# Altium PCB PCB1.PcbDoc
Units mm, origin at the board's own origin, x right, y up, seen from the top; angles counter-clockwise.
Board outline 106 x 105.99 mm, 2 copper layers (Top Layer, Bottom Layer), stack 1.371 mm thick; 27 components, 43 nets, 205 pads, 402 vias.
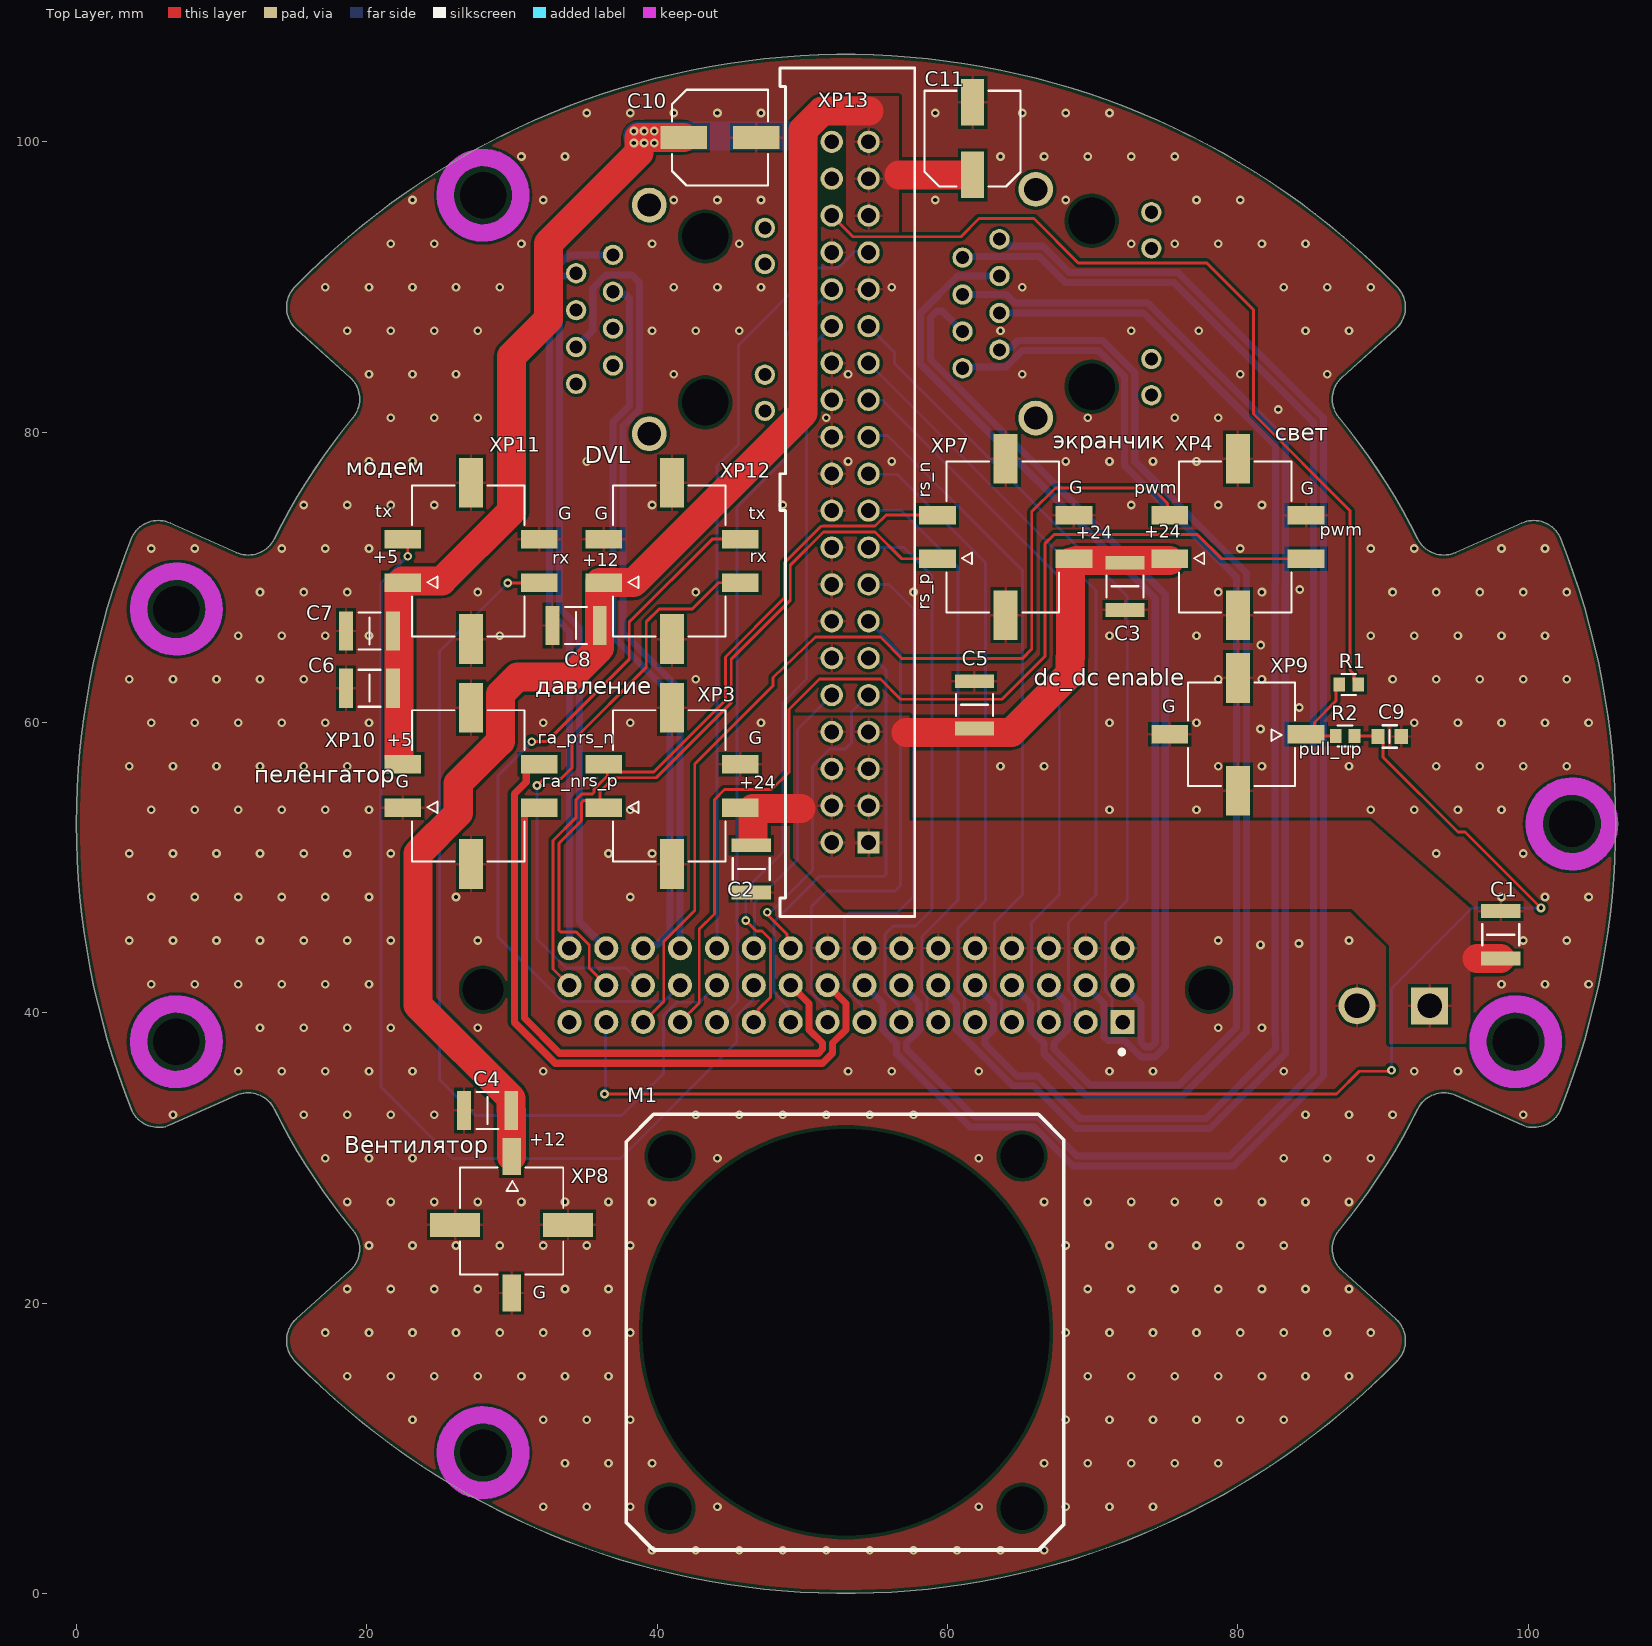
[diagram p0: Top Layer view]
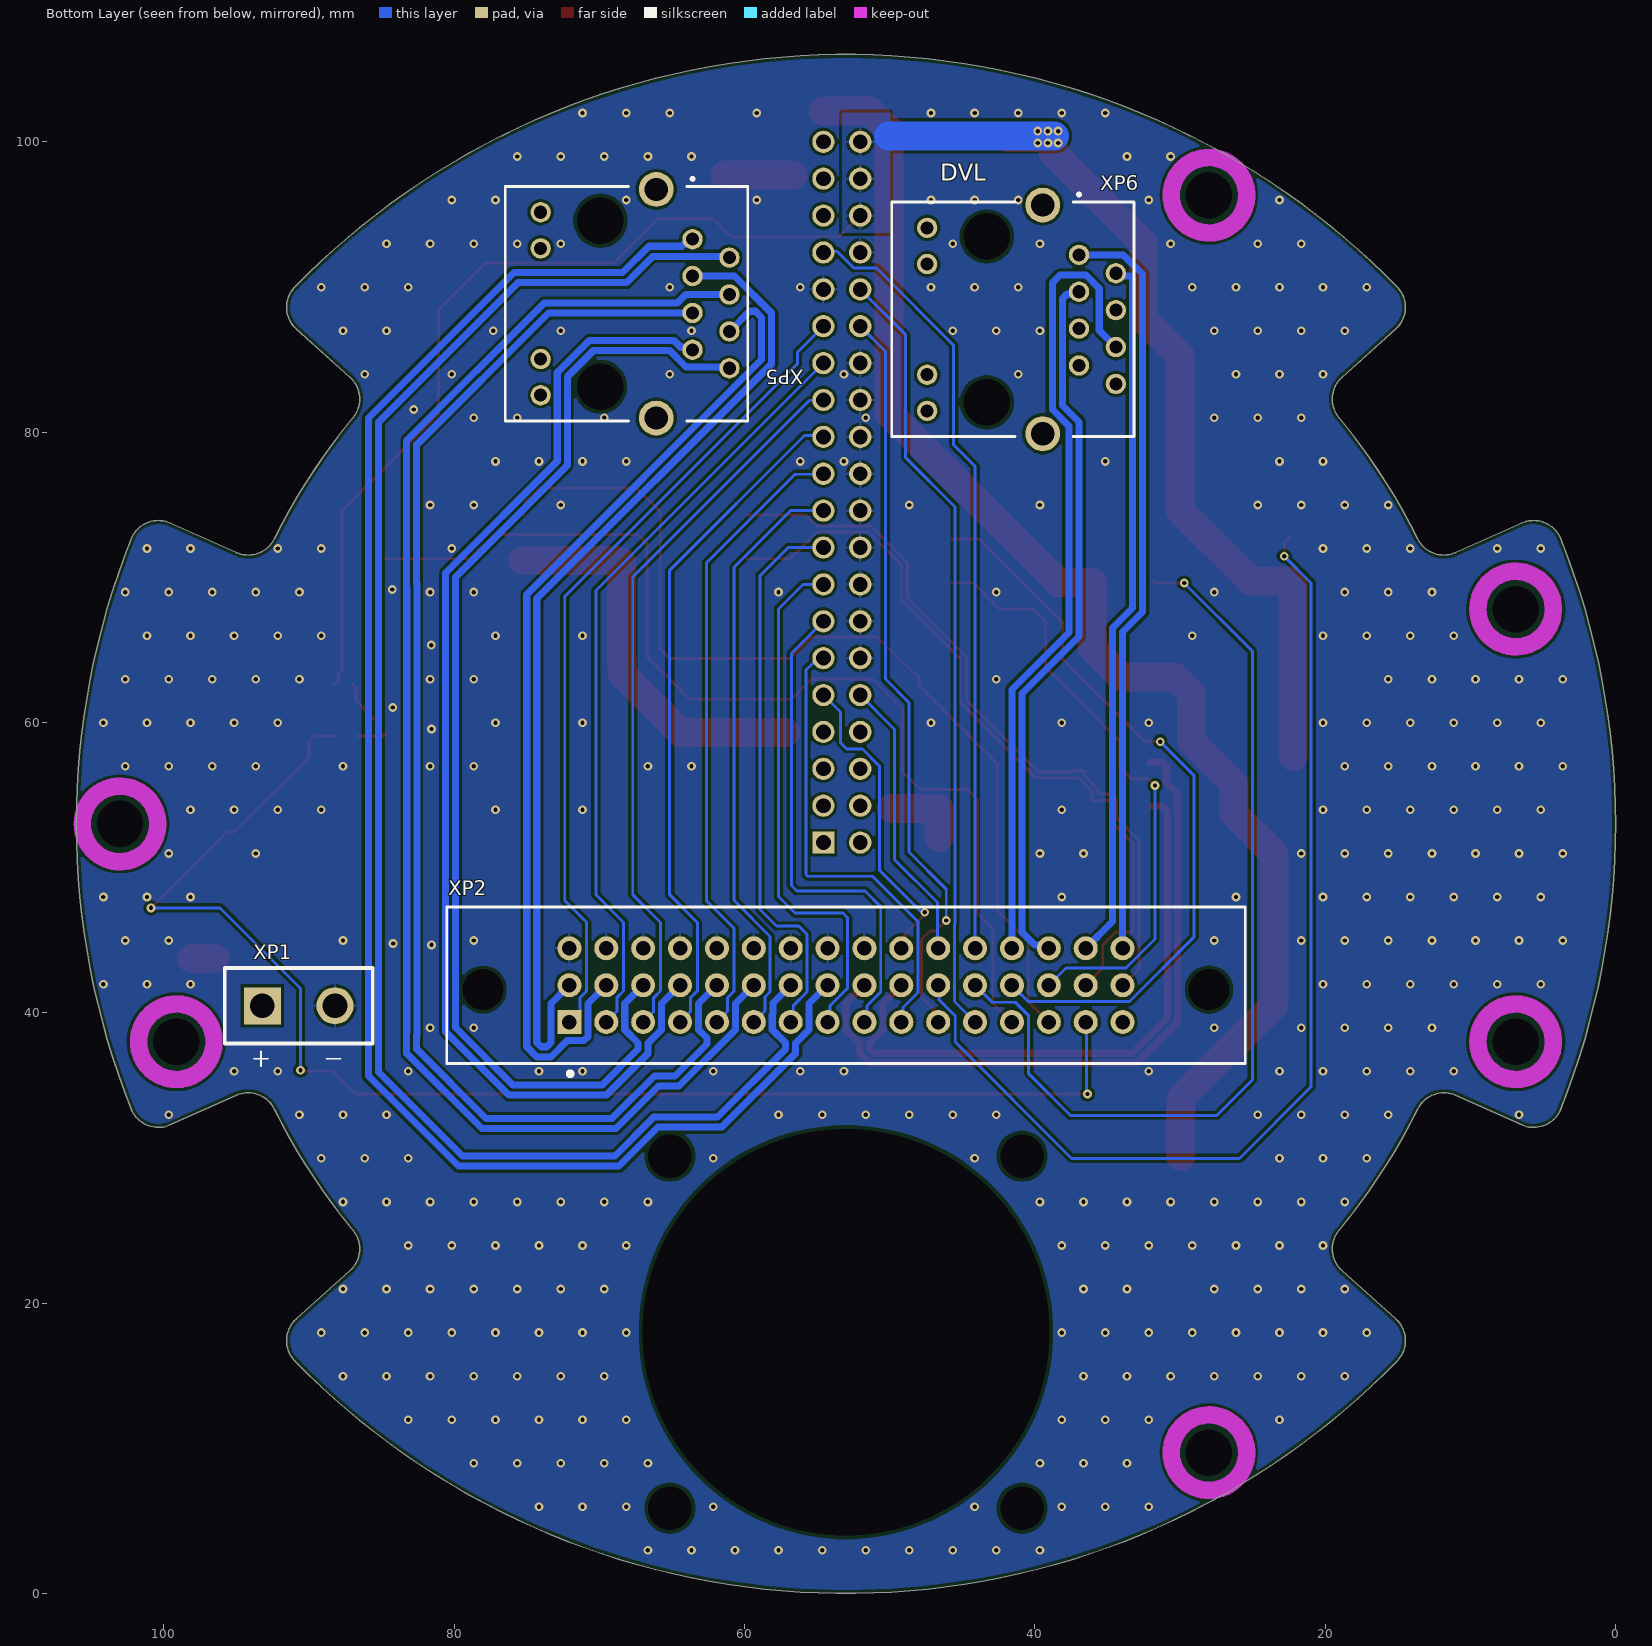
[diagram p1: Bottom Layer view, seen from below]
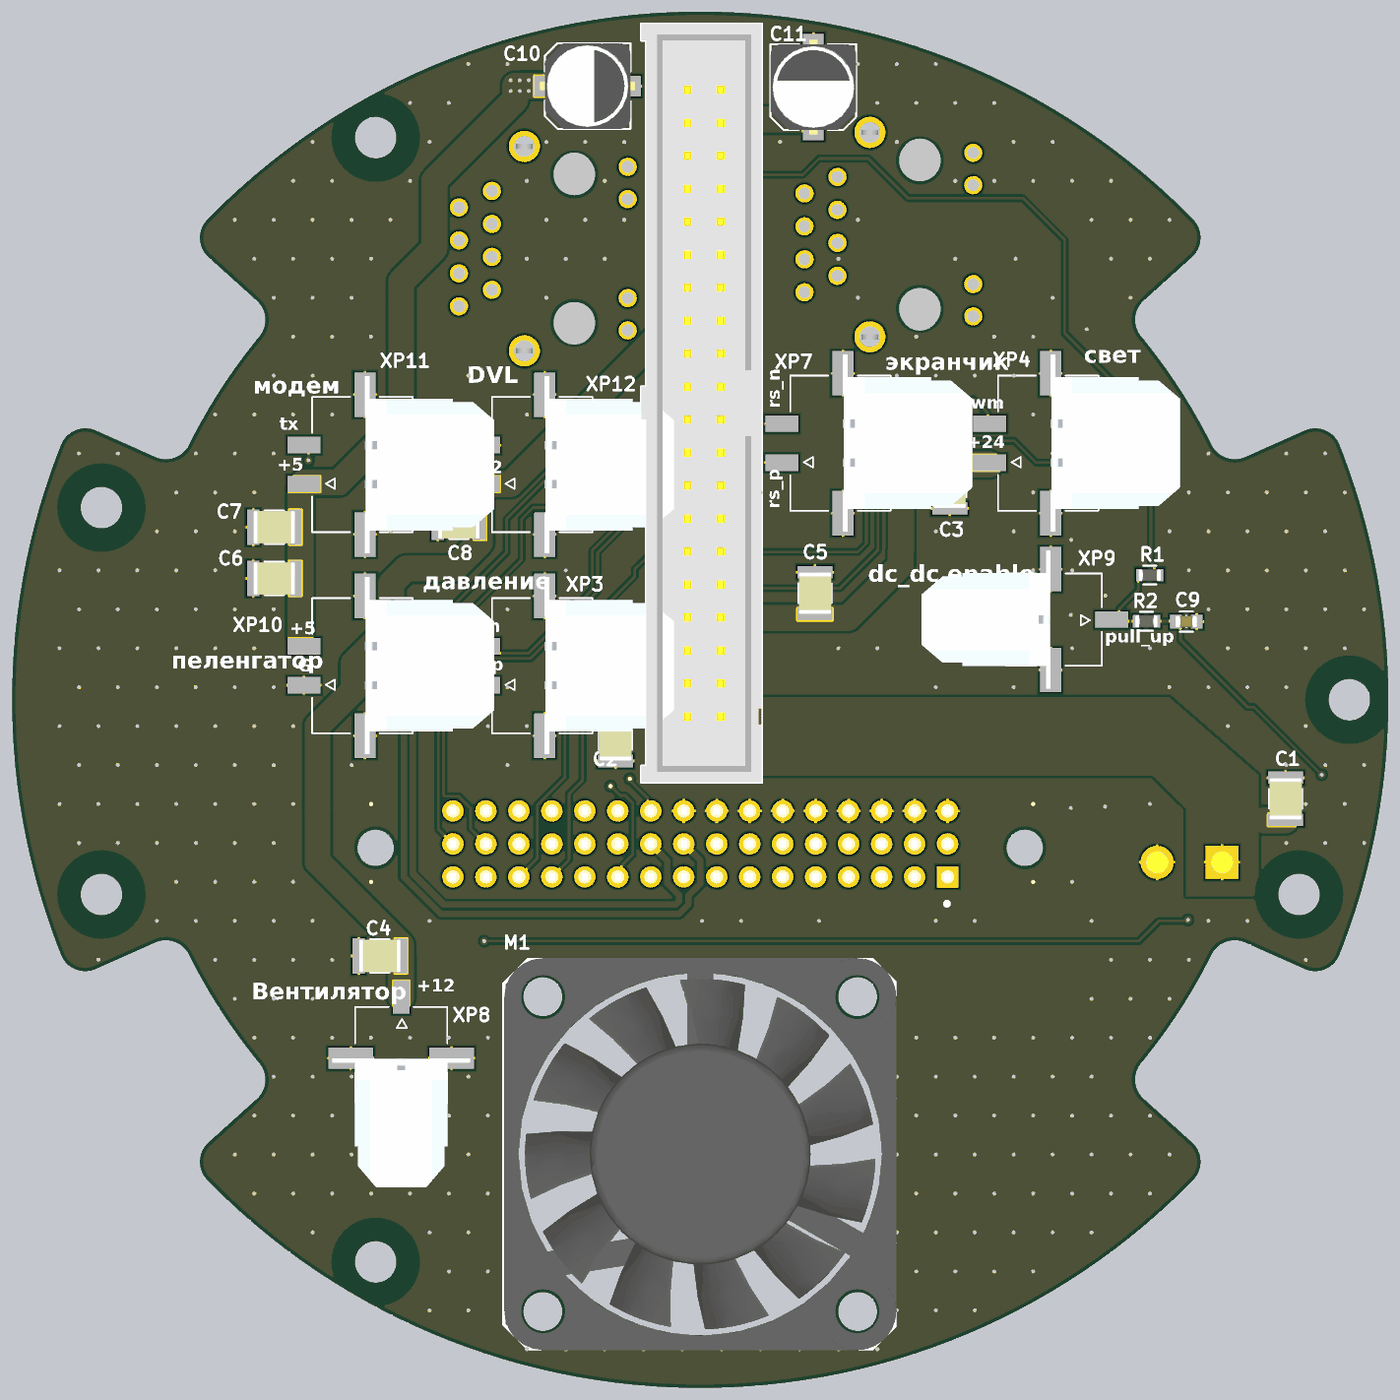
[diagram p2: 3D render of the assembled board from above, using the file's embedded part models]
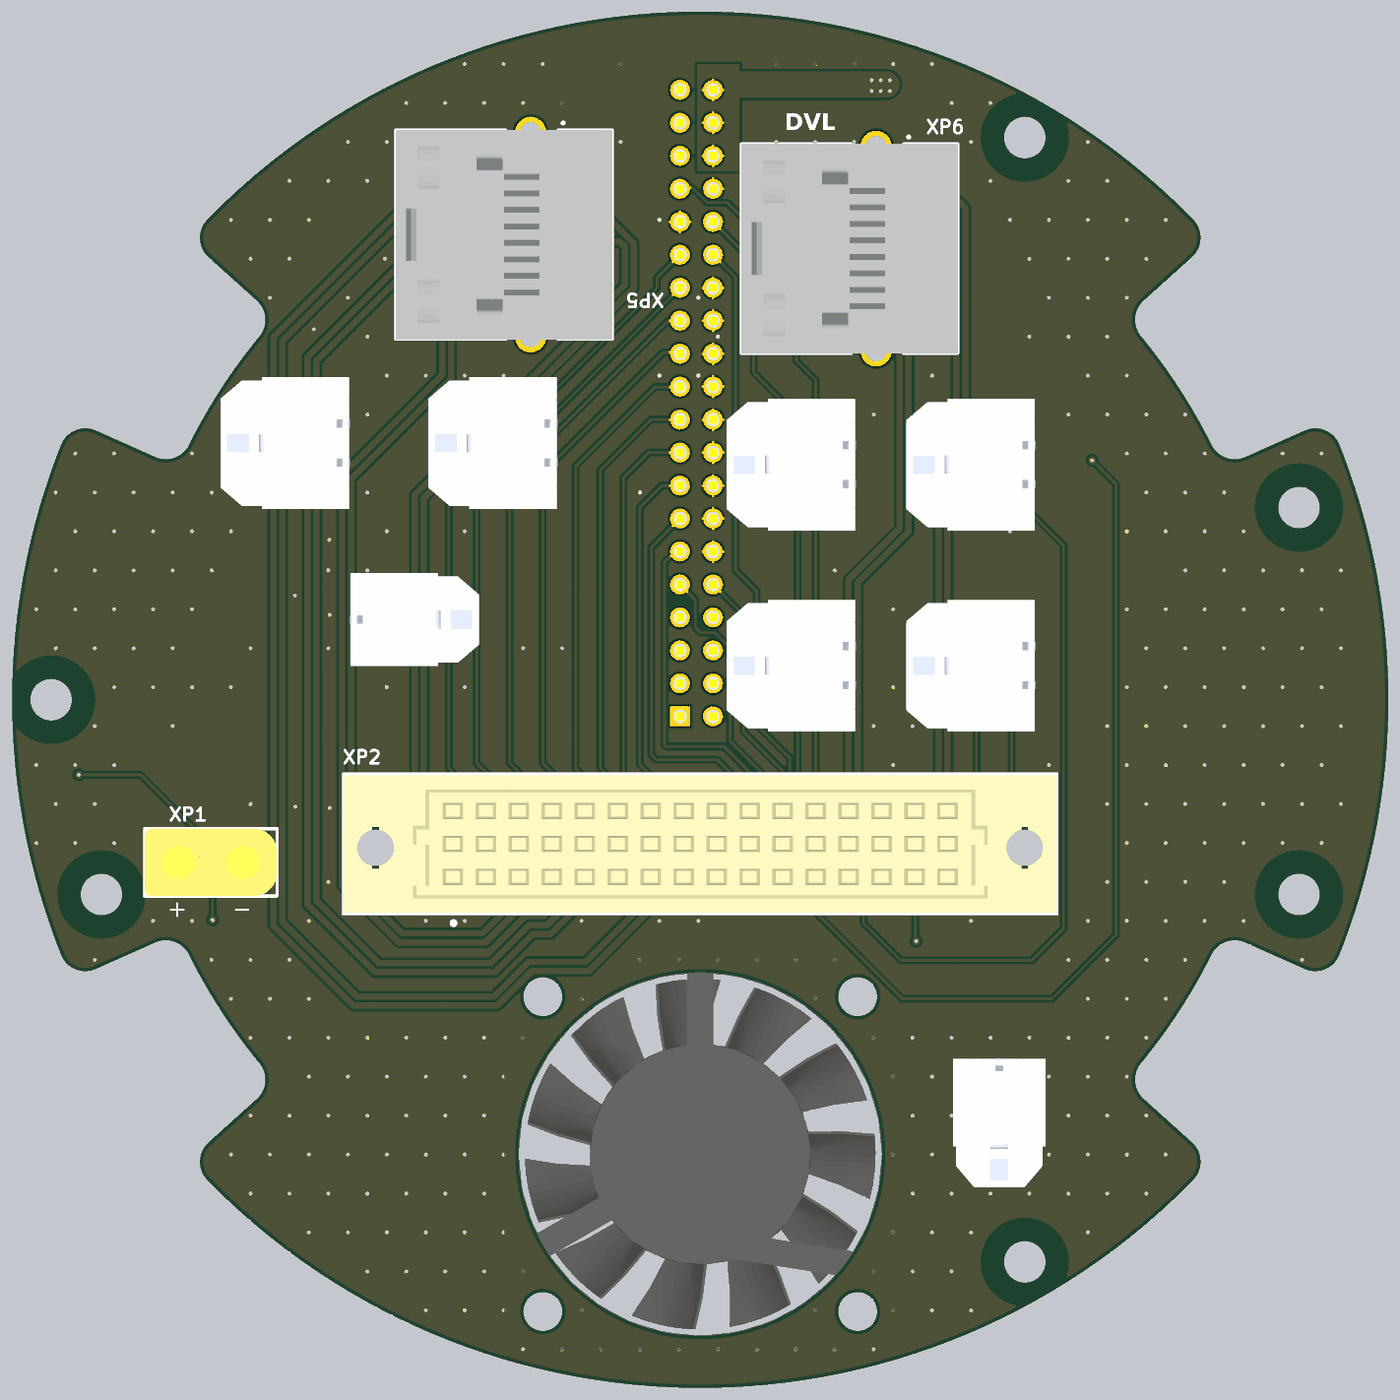
[diagram p3: 3D render of the assembled board from below, using the file's embedded part models]

## Layer stack, top to bottom
Top Solder: solder mask 0.0102, Solder Resist, Dk 3.5
Top Layer: signal copper 0.0356
Dielectric 1: dielectric 1.3, FR-4, Dk 4.8
Bottom Layer: signal copper 0.0356
Bottom Solder: solder mask 0.0102, Solder Resist, Dk 3.5

## Board outline
6.451,32.279 cw(c5.638,34.106) 3.78,33.365 cw(c53.006,53.006) 3.78,72.648 cw(c5.638,71.907) 6.451,73.734 11.023,71.699 ccw(c11.836,73.526) 13.626,72.634 cw(c53.006,53.006) 19.058,80.999 ccw(c17.515,82.271) 18.854,83.757 15.135,87.106 cw(c16.473,88.592) 15.04,89.988 cw(c53.006,53.006) 90.972,89.988 cw(c89.539,88.592) 90.877,87.106 87.158,83.757 ccw(c88.497,82.271) 86.954,80.999 cw(c53.006,53.007) 92.386,72.634 ccw(c94.176,73.526) 94.989,71.699 99.561,73.734 cw(c100.374,71.907) 102.232,72.648 cw(c53.006,53.006) 102.232,33.365 cw(c100.374,34.106) 99.561,32.279 94.989,34.314 ccw(c94.176,32.487) 92.386,33.379 cw(c53.006,53.006) 86.954,25.014 ccw(c88.497,23.742) 87.158,22.255 90.877,18.907 cw(c89.539,17.421) 90.972,16.025 cw(c53.006,53.006) 15.04,16.025 cw(c16.473,17.421) 15.135,18.907 18.854,22.255 ccw(c17.515,23.742) 19.058,25.014 cw(c53.006,53.006) 13.626,33.379 ccw(c11.836,32.487) 11.023,34.314

## Design rules (kind name [scope] priority, off if disabled: settings)
AcuteAngle [All] p1: minimum=3.50000000000000E+0001 checktracksonly=FALSE
BoardOutlineClearance "BoardOutlineClearance 1" [All] p1: gap=0.25 ignorepadtopadclearanceinfootprint=FALSE except(0: Arc-SplitContinuation Track-SplitContinuation SMDPad-SplitContinuation THPad-SplitContinuation Via-SplitContinuation Fill-SplitContinuation Poly-SplitContinuation Region-SplitContinuation Text-SplitContinuation) // Milling
BoardOutlineClearance "BoardOutlineClearance 2" [All] p2: gap=0.4 ignorepadtopadclearanceinfootprint=FALSE except(0: Arc-SplitContinuation Track-SplitContinuation SMDPad-SplitContinuation THPad-SplitContinuation Via-SplitContinuation Fill-SplitContinuation Poly-SplitContinuation Region-SplitContinuation Text-SplitContinuation) // V-Cut
Clearance "Clearance-1 1 Oz" [All] p1: gap=0.2 ignorepadtopadclearanceinfootprint=FALSE except(0.25: Arc-Hole Track-Hole SMDPad-Hole THPad-Hole Via-Hole Fill-Hole Poly-Hole Region-Hole Text-Hole) // Standart
Clearance "Clearance-2 1 Oz" [All] p2: gap=0.15 ignorepadtopadclearanceinfootprint=FALSE except(0.2: Arc-Fill Arc-Poly Track-Fill Track-Poly SMDPad-Fill SMDPad-Poly THPad-Fill THPad-Poly Via-Fill Via-Poly Fill-Fill Fill-Poly Poly-Poly; 0.25: Arc-Hole Track-Hole SMDPad-Hole THPad-Hole Via-Hole Fill-Hole Poly-Hole Region-Hole Text-Hole) // Advance
Clearance "Clearance 2 Oz" [All] p3: gap=0.3 ignorepadtopadclearanceinfootprint=FALSE except(0.25: Arc-Hole Track-Hole SMDPad-Hole THPad-Hole Via-Hole Fill-Hole Poly-Hole Region-Hole Text-Hole)
Clearance "Clearance-1 1/2 Oz" [All] p4: gap=0.125 ignorepadtopadclearanceinfootprint=FALSE except(0.2: Arc-Fill Arc-Poly Track-Fill Track-Poly SMDPad-SMDPad SMDPad-Fill SMDPad-Poly THPad-Fill THPad-Poly Via-Fill Via-Poly Fill-Fill Fill-Poly Poly-Poly Poly-Region Poly-Text; 0.25: Arc-Hole Track-Hole SMDPad-Hole THPad-Hole Via-Hole Fill-Hole Poly-Hole Region-Hole Text-Hole) // Standart
Clearance "Clearance-2 1/2 Oz" [All] p5: gap=0.1 ignorepadtopadclearanceinfootprint=FALSE except(0.15: Arc-Fill Arc-Poly Track-Fill Track-Poly SMDPad-SMDPad SMDPad-Fill SMDPad-Poly THPad-Fill THPad-Poly Via-Fill Via-Poly Fill-Fill Fill-Poly Poly-Poly Poly-Region Poly-Text; 0.25: Arc-Hole Track-Hole SMDPad-Hole THPad-Hole Via-Hole Fill-Hole Poly-Hole Region-Hole Text-Hole) // Advance
Clearance "Clearance 3 Oz" [All] p6: gap=0.35 ignorepadtopadclearanceinfootprint=FALSE except(0.25: Arc-Hole Track-Hole SMDPad-Hole THPad-Hole Via-Hole Fill-Hole Poly-Hole Region-Hole Text-Hole)
DiffPairsRouting "DiffPairsRouting usb" [InNetClass('USB')] p1: maxlimit=0.2 minlimit=0.2 mostfreqgap=0.2 toplayer_minwidth=0.49 toplayer_maxwidth=0.49 toplayer_prefwidth=0.49 bottomlayer_minwidth=0.49 bottomlayer_maxwidth=0.49 bottomlayer_prefwidth=0.49 impedanceprofiledriven=TRUE impedanceprofileid={BD4CF581-8F51-437B-B1AF-2C4708C40790} impedanceprofilevalue=100.000000 maxuncoupledlength=12.7
DiffPairsRouting "DiffPairsRouting ethernet" [InNetClass('Ethernet')] p2: maxlimit=0.2 minlimit=0.2 mostfreqgap=0.2 toplayer_minwidth=0.49 toplayer_maxwidth=0.49 toplayer_prefwidth=0.49 bottomlayer_minwidth=0.49 bottomlayer_maxwidth=0.49 bottomlayer_prefwidth=0.49 impedanceprofiledriven=TRUE impedanceprofileid={BD4CF581-8F51-437B-B1AF-2C4708C40790} impedanceprofilevalue=100.000000 maxuncoupledlength=12.7
DiffPairsRouting "DiffPairsRouting 1 Oz" [All] p3: maxlimit=0.254 minlimit=0.2 mostfreqgap=0.254 toplayer_minwidth=0.2 toplayer_maxwidth=0.381 toplayer_prefwidth=0.381 bottomlayer_minwidth=0.2 bottomlayer_maxwidth=0.381 bottomlayer_prefwidth=0.381 maxuncoupledlength=12.7
DiffPairsRouting "DiffPairsRouting 1/2 Oz" [All] p4: maxlimit=0.254 minlimit=0.1 mostfreqgap=0.254 toplayer_minwidth=0.1 toplayer_maxwidth=0.381 toplayer_prefwidth=0.381 bottomlayer_minwidth=0.1 bottomlayer_maxwidth=0.381 bottomlayer_prefwidth=0.381 maxuncoupledlength=12.7
HoleSize [HasPad('M1-0')] p1: absolutevalues=TRUE maxlimit=100 minlimit=0.025 maxpercent=80.000 minpercent=20.000
HoleSize "Minimum HoleSize" [IsPad] p2: absolutevalues=TRUE maxlimit=5.9 minlimit=0.6 maxpercent=80.000 minpercent=20.000
HoleSize "Minimum HoleSize VIA 1" [IsVia] p3: absolutevalues=TRUE maxlimit=5.9 minlimit=0.3 maxpercent=80.000 minpercent=20.000 // Standart
HoleSize "Minimum HoleSize VIA 2" [IsVia] p4: absolutevalues=TRUE maxlimit=5.9 minlimit=0.2 maxpercent=80.000 minpercent=20.000 // Advance
HoleToHoleClearance Hole2HoleClearance [All] p1: gap=0.25 allowstackedmicrovias=FALSE
MinimumAnnularRing "Minimum AR VIA Standart" [IsVia] p1: minimumring=0.15
MinimumAnnularRing "Minimum AR PAD Standart" [IsPAD] p2: minimumring=0.2
MinimumAnnularRing "Minimum AR VIA Advance" [IsVia] p3: minimumring=0.1
MinimumAnnularRing "Minimum AR PAD Advance" [IsPAD] p4: minimumring=0.15
MinimumSolderMaskSliver "SolderMask Bridge Standart" [All] p1: minsoldermaskwidth=0.15 // All Masks
MinimumSolderMaskSliver "SolderMask Bridge Advance" [All] p2: minsoldermaskwidth=0.1 // Mask LDI
PlaneClearance "PlaneClearance 1 Oz" [All] p1: clearance=0.2
PlaneClearance "PlaneClearance-1 1/2 Oz" [All] p2: clearance=0.2 // Standart
PlaneClearance "PlaneClearance-2 1/2 Oz" [All] p3: clearance=0.15 // Advance
PlaneClearance "PlaneClearance 3 Oz" [All] p4: clearance=0.35
PlaneClearance "PlaneClearance 2 Oz" [All] p5: clearance=0.3
PlaneConnect "TermalConnect-1 1 Oz" [All] p1: planeconnectstyle=Relief reliefexpansion=0.2 reliefentries=4 reliefconductorwidth=0.2 reliefairgap=0.2 // Standart
PlaneConnect "TermalConnect-2 1 Oz" [All] p2: pad.planeconnectstyle=Relief pad.reliefexpansion=0.15 pad.reliefentries=4 pad.reliefconductorwidth=0.2 pad.reliefairgap=0.2 via.planeconnectstyle=Direct via.reliefexpansion=0.15 via.reliefentries=4 via.reliefconductorwidth=0.15 via.reliefairgap=0.15 // Advance
PlaneConnect "TermalConnect-1 1/2 Oz" [All] p3: planeconnectstyle=Relief reliefexpansion=0.2 reliefentries=4 reliefconductorwidth=0.2 reliefairgap=0.2 // Standart
PlaneConnect "TermalConnect-2 1/2 Oz" [All] p4: pad.planeconnectstyle=Relief pad.reliefexpansion=0.15 pad.reliefentries=4 pad.reliefconductorwidth=0.15 pad.reliefairgap=0.15 via.planeconnectstyle=Direct via.reliefexpansion=0.15 via.reliefentries=4 via.reliefconductorwidth=0.15 via.reliefairgap=0.15 // Advance
PlaneConnect "TermalConnect 3 Oz" [All] p5: planeconnectstyle=Relief reliefexpansion=0.2 reliefentries=4 reliefconductorwidth=0.35 reliefairgap=0.35 // Standart
PlaneConnect "TermalConnect 2 Oz" [All] p6: planeconnectstyle=Relief reliefexpansion=0.2 reliefentries=4 reliefconductorwidth=0.3 reliefairgap=0.3 // Standart
PolygonConnect "PolygonConnect-1 1 Oz" [All] p1: thpad.connectstyle=Relief thpad.reliefconductorwidth=0.2 thpad.reliefentries=4 thpad.polygonreliefangle="90 Angle" thpad.airgapwidth=0.2 smdpad.connectstyle=Relief smdpad.reliefconductorwidth=0.2 smdpad.reliefentries=4 smdpad.polygonreliefangle="90 Angle" smdpad.airgapwidth=0.2 via.connectstyle=Direct via.reliefconductorwidth=0.254 via.reliefentries=4 via.polygonreliefangle="90 Angle" via.airgapwidth=0.254 // Standart
PolygonConnect "PolygonConnect-2 1 Oz" [All] p2: thpad.connectstyle=Relief thpad.reliefconductorwidth=0.15 thpad.reliefentries=4 thpad.polygonreliefangle="90 Angle" thpad.airgapwidth=0.15 smdpad.connectstyle=Relief smdpad.reliefconductorwidth=0.15 smdpad.reliefentries=4 smdpad.polygonreliefangle="90 Angle" smdpad.airgapwidth=0.15 via.connectstyle=Direct via.reliefconductorwidth=0.254 via.reliefentries=4 via.polygonreliefangle="90 Angle" via.airgapwidth=0.254 // Advance
PolygonConnect "PolygonConnect-1 1/2 Oz" [All] p3: thpad.connectstyle=Relief thpad.reliefconductorwidth=0.15 thpad.reliefentries=4 thpad.polygonreliefangle="90 Angle" thpad.airgapwidth=0.2 smdpad.connectstyle=Relief smdpad.reliefconductorwidth=0.2 smdpad.reliefentries=4 smdpad.polygonreliefangle="90 Angle" smdpad.airgapwidth=0.2 via.connectstyle=Direct via.reliefconductorwidth=0.254 via.reliefentries=4 via.polygonreliefangle="90 Angle" via.airgapwidth=0.254 // Standart
PolygonConnect "PolygonConnect-2 1/2 Oz" [All] p4: thpad.connectstyle=Relief thpad.reliefconductorwidth=0.125 thpad.reliefentries=4 thpad.polygonreliefangle="90 Angle" thpad.airgapwidth=0.15 smdpad.connectstyle=Relief smdpad.reliefconductorwidth=0.125 smdpad.reliefentries=4 smdpad.polygonreliefangle="90 Angle" smdpad.airgapwidth=0.15 via.connectstyle=Direct via.reliefconductorwidth=0.254 via.reliefentries=4 via.polygonreliefangle="90 Angle" via.airgapwidth=0.254 // Advance
PolygonConnect "PolygonConnect 3 Oz" [All] p5: thpad.connectstyle=Relief thpad.reliefconductorwidth=0.35 thpad.reliefentries=4 thpad.polygonreliefangle="90 Angle" thpad.airgapwidth=0.35 smdpad.connectstyle=Relief smdpad.reliefconductorwidth=0.35 smdpad.reliefentries=4 smdpad.polygonreliefangle="90 Angle" smdpad.airgapwidth=0.35 via.connectstyle=Direct via.reliefconductorwidth=0.254 via.reliefentries=4 via.polygonreliefangle="90 Angle" via.airgapwidth=0.254
PolygonConnect "PolygonConnect 2 Oz" [All] p6: thpad.connectstyle=Relief thpad.reliefconductorwidth=0.3 thpad.reliefentries=4 thpad.polygonreliefangle="90 Angle" thpad.airgapwidth=0.3 smdpad.connectstyle=Relief smdpad.reliefconductorwidth=0.3 smdpad.reliefentries=4 smdpad.polygonreliefangle="90 Angle" smdpad.airgapwidth=0.3 via.connectstyle=Direct via.reliefconductorwidth=0.254 via.reliefentries=4 via.polygonreliefangle="90 Angle" via.airgapwidth=0.254
RoutingCorners [All] p1 off: cornerstyle=45-Degree minsetback=2.54 maxsetback=2.54
RoutingVias [All] p1: holewidth=0.3 width=0.6 viastyle="Through Hole" minholewidth=0.2 minwidth=0.4 maxholewidth=5.9 maxwidth=6.4
SilkToSilkClearance Silk2SilkClearance [All] p1 off: silktosilkclearance=0.15
SilkToSolderMaskClearance Silk2SolderMaskClearance [IsPad] p1 off: minsilkscreentomaskgap=0.15 clearancetoexposedcopper=TRUE
SolderMaskExpansion SolderMaskExpansion-1 [HoleSize = 0.3] p1: expansion=0.05 istentingtop=TRUE // Standart
SolderMaskExpansion [All] p2: expansion=0.102 istentingtop=FALSE
SolderMaskExpansion "SolderMaskExpansion LDI" [All] p3: expansion=0.025 istentingtop=FALSE // Advance
SupplyNets "Schematic Supply Nets_5" [InNet('+5')] p1: voltage=0.000
SupplyNets "Schematic Supply Nets_4" [InNet('GND')] p2: voltage=0.000
SupplyNets "Schematic Supply Nets_3" [InNet('+24_1')] p3: voltage=0.000
SupplyNets "Schematic Supply Nets_2" [InNet('+24_2')] p4: voltage=0.000
SupplyNets "Schematic Supply Nets_1" [InNet('+24')] p5: voltage=0.000
SupplyNets "Schematic Supply Nets" [InNet('+12')] p6: voltage=0.000
UnRoutedNet [All] p1: checkbadconnections=TRUE
Width "Width 1 Oz" [All] p1: maxlimit=10 minlimit=0.15 preferedwidth=0.2 checkconnectedcopper=TRUE
Width "Width 1/2 Oz" [All] p2: maxlimit=10 minlimit=0.1 preferedwidth=0.125 checkconnectedcopper=TRUE
Width "Width 3 Oz" [All] p3: maxlimit=10 minlimit=0.35 preferedwidth=0.4 checkconnectedcopper=TRUE
Width "Width 2 Oz" [All] p4: maxlimit=10 minlimit=0.3 preferedwidth=0.35 minimp=50.000000 maximp=50.000000 favimp=50.000000 checkconnectedcopper=TRUE
20 further rules are at their usual default settings.

## Classes and differential pairs
net class USB: GA_N GA_P
net class Ethernet: eth1_N eth1_P eth2_N eth2_P eth3_N eth3_P eth4_N eth4_P eth5_N eth5_P eth6_N eth6_P
differential pair RS485: +RS485_N -RS485_P
differential pair GA: +GA_P -GA_N
differential pair eth6: +eth6_P -eth6_N
differential pair eth5: +eth5_P -eth5_N
differential pair eth4: +eth4_P -eth4_N
differential pair eth3: +eth3_P -eth3_N
differential pair eth2: +eth2_P -eth2_N
differential pair eth1: +eth1_P -eth1_N

## Components (designator, comment, footprint, x,y, rotation, side; value= is the part's Value field where it differs from the comment)
C1 "Capacitor" 1210C 98.1,45.375 r270 top value="22 мк"
C2 "Capacitor" 1210C 46.482,49.911 r90 top value="22 мк"
C3 "Capacitor" 1210C 72.225,69.375 r90 top value="22 мк"
C4 "Capacitor" 1210C 28.321,33.274 r0 top value="22 мк"
C5 "Capacitor" 1210C 61.849,61.214 r270 top value="22 мк"
C6 "Capacitor" 1210C 20.193,62.357 r0 top value="22 мк"
C7 "Capacitor" 1210C 20.193,66.294 r0 top value="22 мк"
C8 "Capacitor" 1210C 34.417,66.675 r0 top value="22 мк"
C9 "Capacitor" 0603C 90.447,59.028 r180 top value="0,1 мк"
C10 "Capacitor" ECAP_SMD_6,6x6,6 44.325,100.275 r0 top value="100 мк"
C11 "Capacitor" ECAP_SMD_6,6x6,6 61.722,100.203 r90 top value="100 мк"
M1 "cooler3030" cooler3030 53.006,18.006 r180 top
R1 "Resistor" 0603R 87.63,62.611 r180 top value="1,0 к"
R2 "Resistor" 0603R 87.376,59.055 r180 top value="1,0 к"
XP1 "XT30UPB-F" XT30UPB-F 90.7,40.483 r180 bottom locked
XP2 "DIN41612_48_3row_straight_female" DIN41612_48_3row_straight_female 53.006,41.9 r0 bottom locked
XP3 "430450418" MOLEX_430450418 41.021,55.626 r270 top
XP4 "430450418" MOLEX_430450418 80,72.771 r270 top
XP5 "1734577-3" 1-1734577-3-rj45-8p8c 63.575,93.28 r90 bottom
XP6 "1734577-3" 1-1734577-3-rj45-8p8c 36.957,92.202 r90 bottom
XP7 "430450418" MOLEX_430450418 64,72.771 r270 top
XP8 "430450218" Molex_430450218 29.972,25.4 r180 top
XP9 "430450218" Molex_430450218 80,59.182 r90 top
XP10 "430450418" MOLEX_430450418 27.178,55.626 r270 top
XP11 "430450418" MOLEX_430450418 27.178,71.12 r270 top
XP12 "430450418" MOLEX_430450418 41.021,71.12 r270 top
XP13 "IDC_40_Male conector" "IDC_40_Male conector" 53.295,75.855 r90 top locked

## Footprints (in the part's own frame and the unit in brackets; to place one, negate y for a bottom-side part, rotate by r counter-clockwise, add the part's x,y. Pads: shape width x height; smd on the part's side, far side on the other; paste and mask are expansions set on the pad)
1-1734577-3-rj45-8p8c [mm]
  round 1.4 hole 0.9: 1(0,0) 2(-1.27,-2.54) 3(-2.54,0) 4(-3.81,-2.54) 5(-5.08,0) 6(-6.35,-2.54) 7(-7.62,0) 8(-8.89,-2.54) 9(-10.745,10.46) 10(-8.255,10.46) 11(-0.635,10.46) 12(1.855,10.46)
  round 2.4 hole 1.6: MH1(3.43,2.5) MH2(-12.32,2.5)
  round 0 hole 3.2 unplated: MH3(1.27,6.35) MH4(-10.16,6.35)
  silkscreen extent -12.52,-3.8 4.25,12.9, body extent -12.52,-3.8 3.63,12.9, height 16.54
0603C [mm] "Chip Resistor, 2-Leads, Body 1,40x0,80mm, IPC Medium Density"
  rect 0.9x1.05 smd: 1(-0.8,0) 2(0.8,0)
  silkscreen extent -0.5,-0.77 0.5,0.77, body extent -0.85,-0.45 0.85,0.45, height 0.9
0603R [mm] "Chip Resistor, 2-Leads, Body 1.60x0.85mm, IPC Medium Density"
  rect 0.8x0.95 smd: 1(-0.65,0) 2(0.65,0)
  silkscreen extent -0.5,-0.72 0.5,0.72, body extent -0.87,-0.47 0.88,0.48, height 0.9
1210C [mm]
  rect 0.954x2.706 smd paste+0: 1(-1.625,0) 2(1.625,0)
  silkscreen extent -0.75,-1.28 0.75,1.28, body extent -2.35,-1.6 2.35,1.6, height 0.25
cooler3030 [mm]
  round 1.4 hole 3 unplated: 0(-12.125,12.125) 0(-12.125,-12.125) 0(12.125,12.125) 0(12.125,-12.125)
  round 0 hole 28 unplated: 0(0,0)
  silkscreen extent -15,-15 15.13,15, body extent -15.1,-15.1 15.1,15.1, height 6.6
DIN41612_48_3row_straight_female [mm]
  rect 1.65x1.65 hole 1: A1(19.05,2.54)
  round 1.65 hole 1: A2(16.51,2.54) A3(13.97,2.54) A4(11.43,2.54) A5(8.89,2.54) A6(6.35,2.54) A7(3.81,2.54) A8(1.27,2.54) A9(-1.27,2.54) A10(-3.81,2.54) A11(-6.35,2.54) A12(-8.89,2.54) A13(-11.43,2.54) A14(-13.97,2.54) A15(-16.51,2.54) A16(-19.05,2.54) B1(19.05,0) B2(16.51,0) B3(13.97,0) B4(11.43,0) B5(8.89,0) B6(6.35,0) B7(3.81,0) B8(1.27,0) B9(-1.27,0) B10(-3.81,0) B11(-6.35,0) B12(-8.89,0) B13(-11.43,0) B14(-13.97,0) B15(-16.51,0) B16(-19.05,0) C1(19.05,-2.54) C2(16.51,-2.54) C3(13.97,-2.54) C4(11.43,-2.54) C5(8.89,-2.54) C6(6.35,-2.54) C7(3.81,-2.54) C8(1.27,-2.54) C9(-1.27,-2.54) C10(-3.81,-2.54) C11(-6.35,-2.54) C12(-8.89,-2.54) C13(-11.43,-2.54) C14(-13.97,-2.54) C15(-16.51,-2.54) C16(-19.05,-2.54)
  round 2.5 hole 2.8 unplated: ""(-25,0.3) ""(25,0.3)
  silkscreen extent -27.5,-5.4 27.5,6.25, body extent -27.45,-5.3 27.45,5.29, height 11.3
ECAP_SMD_6,6x6,6 [mm]
  rect 3.2x1.6 smd: 1(-2.5,0) 2(2.5,0)
  silkscreen extent -3.3,-3.3 3.3,3.3, body extent -3.65,-3.3 3.65,3.3, height 7.7
"IDC_40_Male conector" [mm] "Connector; IDC"
  rect 1.53x1.53 / inner round 1.53 / far side rect 1.53x1.53 hole 1.02: 1(-24.13,-1.27)
  round 1.53 hole 1.02: 2(-24.13,1.27) 3(-21.59,-1.27) 4(-21.59,1.27) 5(-19.05,-1.27) 6(-19.05,1.27) 7(-16.51,-1.27) 8(-16.51,1.27) 9(-13.97,-1.27) 10(-13.97,1.27) 11(-11.43,-1.27) 12(-11.43,1.27) 13(-8.89,-1.27) 14(-8.89,1.27) 15(-6.35,-1.27) 16(-6.35,1.27) 17(-3.81,-1.27) 18(-3.81,1.27) 19(-1.27,-1.27) 20(-1.27,1.27) 21(1.27,-1.27) 22(1.27,1.27) 23(3.81,-1.27) 24(3.81,1.27) 25(6.35,-1.27) 26(6.35,1.27) 27(8.89,-1.27) 28(8.89,1.27) 29(11.43,-1.27) 30(11.43,1.27) 31(13.97,-1.27) 32(13.97,1.27) 33(16.51,-1.27) 34(16.51,1.27) 35(19.05,-1.27) 36(19.05,1.27) 37(21.59,-1.27) 38(21.59,1.27) 39(24.13,-1.27) 40(24.13,1.27)
  silkscreen extent -29.21,-4.45 29.21,4.82, body extent -29.21,-4.45 29.21,4.83, height 8.89
Molex_430450218 [mm]
  rect 3.43x1.65 smd mask+0.076: 0(-3.885,0) 0(3.885,0)
  rect 1.27x2.54 smd mask+0.076: 1(0,-4.7) 2(0,4.7)
  silkscreen extent -3.56,-3.94 3.56,3.43, body extent -5.32,-5.6 5.33,5.6, height 9.96
MOLEX_430450418 [mm]
  rect 3.43x1.65 smd mask+0.076: 0(-5.385,0) 0(5.385,0)
  rect 1.27x2.54 smd mask+0.076: 1(1.5,-4.7) 2(-1.5,-4.7) 3(1.5,4.7) 4(-1.5,4.7)
  silkscreen extent -5.21,-4.06 5.21,3.68, body extent -6.82,-5.6 6.83,5.6, height 9.96
XT30UPB-F [mm]
  round 2.55 hole 1.7: N(2.5,0)
  rect 2.55x2.55 / inner round 2.55 / far side rect 2.55x2.55 hole 1.7: P(-2.5,0)
  silkscreen extent -5.1,-4.15 5.1,2.6, body extent -5.1,-2.6 5.1,2.6, height 9.4

## Part data
C1 C2 C3 C4 C5 C6 C7 C8: library part Capacitor_22u_10_25V_X7R_1210C, "Конденсатор 1210C ёмкостью 22 мк 10%, 25 В, X7R", Capacity (nF)=22000, Dielectric=X7R, Tolerance=10%, Voltage (V)=25, Part Number=Capacitor_22u_10_25V_X7R_1210C
C9: library part Capacitor_0,1u_10_50V_X7R_0603C, "Конденсатор 0603C ёмкостью 0,1 мк 10%, 50 В, X7R", Capacity (nF)=100, Dielectric=X7R, Tolerance=10%, Voltage (V)=50, Part Number=Capacitor_0,1u_10_50V_X7R_0603C
C10 C11: library part JCK1V101, "Конденсатор алюминиевый электролитический 100мкФ 35В 20% SMD 6,6x6,6 мм", Capacity (uF)=100, Tolerance=20, Voltage (V)=35, Part Number=JCK1V101, Type="SMD Aluminum"
M1: "вентилятор 30*30 с дыркой на плате", Part Number=cooler3030
R1 R2: library part Resistor_1.0k_1_0603, "Резистор номиналом 1,0 кОм 1%", Tolerance=1%, Part Number=Resistor_1.0k_1_0603
XP1: "30 А (15 продолжительно), прямая мать", Value1="эта плюс", Value2="это пинус", Part Number=XT30UPB-F, System=Connector
XP2: "DIN41612R (DS1120-48F0V13), Разъем (розетка) тип B 48pin (3х16), шаг 2.54мм трехрядный прямой (ряд АBC)", Datasheet=https://cdn.promelec.ru/upload/datasheet/3/1/DS1120.pdf, Parameter 1=PWM1, Parameter 2=DSHOT8, Parameter 3=DSHOT9, Parameter 4=DSHOT10, Parameter 5=DSHOT1, Parameter 6=PWM2, Parameter 7=PWM3, Parameter 8=DSHOT2, Parameter 9=DSHOT3, Parameter 10=DSHOT4, Parameter 11=DSHOT6, Parameter 12=DSHOT7, Parameter 13=DSHOT5, Parameter 14=DCDC_EN, Parameter 15=PWM4, Part Number=DIN41612_48_3row_straight_female, System=Connector
XP3 XP7: library part Molex_430450418, "Разъем типа провод-плата, 3 мм, 4 контакт(-ов), Штыревой Разъем, для поверностного монтажа", Value1=Питание, Value2=RS485_P, Value3=RS485_N, Value4=Общий, Part Number=Molex_430450418, System=Connector
XP4: library part Molex_430450418, "Разъем типа провод-плата, 3 мм, 4 контакт(-ов), Штыревой Разъем, для поверностного монтажа", Value1=Питание, Value2=PWM1, Value3=PWM2, Value4=Общий, Part Number=Molex_430450418, System=Connector
XP5 XP6: library part 1-1734577-3-rj45-8p8c, "Модульный разъем, Cat3, RJ45, Гнездо, 8 контакт(-ов), 8 вывод(-ов), 1 порт(-ов)", Part Number=1-1734577-3-rj45-8p8c, System=Connector
XP8: library part Molex_430450218, "Разъем типа провод-плата, 3 мм, 2 контакт(-ов), Штыревой Разъем, Серия Micro-Fit для поверхностного монтажа", Value1=Питание, Value2=Общий, Value3=Корпус, Part Number=Molex_430450218, System=Connector, Value4=Корпус
XP9: library part Molex_430450218, "Разъем типа провод-плата, 3 мм, 2 контакт(-ов), Штыревой Разъем, Серия Micro-Fit для поверхностного монтажа", Value1=Выключатель, Value2=Общий, Value3=Корпус, Part Number=Molex_430450218, System=Connector, Value4=Корпус
XP10: library part Molex_430450418, "Разъем типа провод-плата, 3 мм, 4 контакт(-ов), Штыревой Разъем, для поверностного монтажа", Value1=Питание, Value2=GA_P, Value3=GA_N, Value4=Общий, Part Number=Molex_430450418, System=Connector
XP11 XP12: library part Molex_430450418, "Разъем типа провод-плата, 3 мм, 4 контакт(-ов), Штыревой Разъем, для поверностного монтажа", Value1=Питание, Value2=RX, Value3=TX, Value4=Общий, Part Number=Molex_430450418, System=Connector
XP13: "IDC 40-пиновый разъём прямая вилка", Value1=+24, Value2={Value}, Part Number="IDC_40_Male conector", System=Connector, Value3={Value}, Value4={Value}, Value5={Value}, Value6={Value}, Value7={Value}, Value8={Value}, Value9={Value}, Value10={Value}, Value11={Value}, Value12={Value}, Value13={Value}, Value14={Value}, Value15={Value}, Value16={Value}, Value17={Value}, Value18={Value}, Value19={Value}, Value20={Value}

## Free pads (board coordinates)
  rect 0x0 hole 3.2 unplated mask+0: 3(6.884,67.806) 3(6.885,38.006) 3(28.007,9.705) 3(28.007,96.308) 3(99.129,38.006) 3(103.007,53.006)

## Via types
v1: diameter 0.6, hole 0.3, Top Layer to Bottom Layer, tented both sides, 402 vias

## Nets (pads, with @x,y where several pads share a name; then routed paths per layer and width w, separated by ;. In a path a pad name is that pad's centre, name@x,y a point inside that pad or via, vN(x,y) a via of type N, cw(c..) or ccw(c..) an arc to the next point about the centre after c; other vN are vias at no path point)
+5: C6.2 C7.2 C10.1 R1.1 XP10.2 XP11.1 XP13.36 XP13.38 XP13.40 | length 126.8
  Top Layer w0.2: XP13.36 53.48,93.45 60.918,93.45 62.168,94.7 65.95,94.7 69.005,91.645 77.855,91.645 81.075,88.425 81.075,81.231 87.725,74.581 87.725,63.599 87.98,63.344 87.98,62.911 R1.1
  Top Layer w2: XP10.2@22.208,57.658 22.208,66.294 22.208,69.477 22.478,69.747 25.172,69.747 29.972,74.547 29.972,85.217 32.517,87.762 32.517,92.992 38.75,99.225 38.75,100.295 ; 39.1,100.295 C10.1@41.805,100.295
  Bottom Layer w2: 38.65,100.4 39.8,100.4 50.075,100.4
  other v1: 38.4,99.9 39.1,99.9 39.8,99.9 38.4,100.725 39.1,100.725 39.8,100.725
+12: C4.2 C8.2 C11.1 XP8.1 XP12.1 XP13.35 XP13.37 XP13.39 | length 97.6
  Top Layer w2: C4.2 29.946,34.104 23.525,40.525 23.525,50.975 26.3,53.75 26.3,55.8 29.203,58.703 29.203,61.947 30.375,63.119 34.036,63.119 36.042,65.125 C8.2 36.042,69.62 XP12.1 38.373,69.62 50.06,81.307 50.06,100.799 51.369,102.108 54.591,102.108 ; C4.2@29.959,33.261 29.959,30.113 XP8.1 ; 56.642,97.703 C11.1@61.341,97.703
+24: C1.2 C2.2 C3.2 C5.2 XP1.P XP3.3 XP4.1 XP7.3 XP13.1 XP13.2 XP13.3 XP13.4 XP13.5 XP13.6 XP13.7 XP13.8 | length 34.1
  Top Layer w2: 46.609,52.07 46.609,54.078 49.911,54.078 ; 57.15,59.309 64.389,59.309 68.445,63.365 68.445,64.453 68.475,64.483 XP7.3@68.475,71.046 ; XP7.3@68.836,71.135 XP4.1@75.3,71.135 ; 96.449,43.724 C1.2@98.074,43.724
+24_1: XP2.C11 XP13.10 | length 19.7
  Bottom Layer w0.2: XP2.C11 46.701,44.485 46.701,47.59 49.657,50.546 49.657,59.517 XP13.10
+24_2: XP2.C10 XP13.9 | length 21.8
  Top Layer w0.2: v1(47.584,46.916) 47.661,46.839 47.661,46.686 48.956,45.391 48.956,44.68 XP2.C10
  Bottom Layer w0.2: v1(47.584,46.916) 47.661,46.992 47.881,46.992 50.7,49.811 50.7,56.986 51.88,58.166 52.959,58.166 53.388,58.595 53.388,60.708 XP13.9
DCDC_EN: C9.2 R2.1 XP2.A15 | length 96.5
  Top Layer w0.2: v1(36.374,34.411) 36.38,34.417 86.792,34.417 88.35,35.975 90.5,35.975 v1(90.575,36.05) ; R2.1 89.62,59.055 C9.2 89.997,58.678 89.997,57.603 95.149,52.451 95.648,52.451 v1(100.876,47.223)
  Bottom Layer w0.2: v1(36.374,34.411) 36.435,34.472 36.435,39.299 XP2.A15 ; v1(90.575,36.05) 90.575,41.679 96.119,47.223 v1(100.876,47.223)
DSHOT1: XP2.A10 XP13.11 | length 32.1
  Bottom Layer w0.2: XP2.A10 49.078,39.478 49.078,40.368 48.05,41.396 48.05,46.272 51.181,49.403 55.636,49.403 55.753,49.52 55.753,63.627 55.492,63.888 55.462,63.888 54.925,64.425 XP13.11
DSHOT2: XP2.A9 XP13.13 | length 34.3
  Bottom Layer w0.2: XP2.A9 51.56,39.536 51.56,40.485 50.611,41.434 50.611,47.309 51.689,48.387 56.388,48.387 56.769,48.768 56.769,64.761 XP13.13
DSHOT3: XP2.A8 XP13.15 | length 36.7
  Bottom Layer w0.2: XP2.A8 54.1,39.536 54.1,40.485 52.896,41.689 52.896,46.546 53.213,46.863 56.515,46.863 57.658,48.006 57.658,67.818 55.971,69.505 XP13.15
DSHOT4: XP2.A7 XP13.17 | length 38.6
  Bottom Layer w0.2: XP13.17 56.987,72.045 58.928,70.104 58.928,47.117 57.785,45.974 56.261,45.974 55.691,45.404 55.691,41.434 56.64,40.485 56.64,39.536 XP2.A7
DSHOT5: XP2.A6 XP13.19 | length 40.6
  Bottom Layer w0.2: XP13.19 56.815,74.585 60.706,70.694 60.706,47.731 58.231,45.256 58.231,41.434 58.577,41.088 58.577,40.139 XP2.A6
DSHOT6: XP2.A5 XP13.21 | length 43.5
  Bottom Layer w0.2: XP13.21 54.601,77.089 56.511,77.089 62.611,70.989 62.611,47.711 60.706,45.806 60.706,41.499 61.171,41.034 61.171,40.085 XP2.A5
DSHOT7: XP2.A4 XP13.23 | length 46.9
  Bottom Layer w0.2: XP13.23 54.656,79.756 55.869,79.756 65.151,70.474 65.151,48.133 63.246,46.228 63.246,41.499 63.711,41.034 63.711,40.085 XP2.A4
DSHOT8: XP2.A3 XP13.25 | length 50.2
  Bottom Layer w0.2: XP13.25 54.656,82.296 54.765,82.187 55.513,82.187 67.691,70.009 67.691,48.133 65.786,46.228 65.786,41.499 66.251,41.034 66.251,40.085 XP2.A3
DSHOT9: XP2.A2 XP13.27 | length 53.2
  Bottom Layer w0.2: XP13.27 70.231,69.079 70.231,48.133 68.326,46.228 68.326,41.499 68.791,41.034 68.791,40.085 XP2.A2
DSHOT10: XP2.A1 XP13.29 | length 56.4
  Bottom Layer w0.2: XP13.29 56.35,85.5 56.35,84.7 72.375,68.675 72.375,47.737 70.866,46.228 70.866,41.499 71.331,41.034 71.331,40.085 XP2.A1
Enable: XP2.C12 XP13.33 | length 53.9
  Bottom Layer w0.2: XP2.C12 44.116,77.644 45.593,79.121 45.593,85.979 50.914,91.3 52.466,91.3 53.617,92.451 54.298,92.451 54.388,92.542 XP13.33
eth1_N: XP2.B7 XP5.2 | length 112.5
  Bottom Layer w0.49: XP2.B7 58.032,40.684 58.032,39.94 58.086,39.886 58.086,38.834 57.161,37.909 57.161,37.503 61.848,32.816 66.243,32.816 68.919,30.14 79.414,30.14 85.2,35.926 85.2,80.675 75.59,90.285 68.114,90.285 66.299,92.101 61.126,92.101 XP5.2
eth1_P: XP2.B8 XP5.1 | length 113.5
  Bottom Layer w0.49: XP2.B8 55.546,40.63 55.546,38.834 56.471,37.909 56.471,37.217 61.562,32.126 65.957,32.126 68.633,29.45 79.7,29.45 85.89,35.64 85.89,80.961 75.876,90.975 68.4,90.975 66.584,92.791 64.311,92.791 63.821,93.28 XP5.1
eth2_N: XP2.B2 XP5.6 | length 69.1
  Bottom Layer w0.49: XP5.6 59.646,88.319 59.24,88.319 58.815,87.893 58.815,84.991 74.996,68.81 74.996,37.659 74.3,36.963 73.332,36.963 72.205,38.09 71.047,38.09 70.786,38.351 70.786,40.63 XP2.B2
eth2_P: XP2.B1 XP5.3 | length 69.1
  Bottom Layer w0.49: XP5.3 60.686,90.74 58.125,88.179 58.125,84.705 74.306,68.524 74.306,37.945 74.019,37.658 73.613,37.658 73.326,37.945 73.326,40.63 XP2.B1
eth3_N: XP2.B5 XP5.5 | length 93.3
  Bottom Layer w0.49: XP2.B5 63.166,40.63 63.166,38.834 62.587,38.255 62.587,37.849 64.789,35.646 66.204,35.646 69.136,32.715 77.789,32.715 82.575,37.501 82.575,38.396 82.565,38.406 82.565,69.594 82.575,69.604 82.575,79.125 73.5,88.2 XP5.5
eth3_P: XP2.B6 XP5.4 | length 99.8
  Bottom Layer w0.49: XP2.B6 60.626,40.63 60.626,38.834 64.503,34.956 65.919,34.956 68.85,32.025 78.075,32.025 83.265,37.215 83.265,38.681 83.255,38.691 83.255,69.309 83.265,69.319 83.265,79.411 73.786,88.89 64.625,88.89 64.045,89.47 XP5.4
eth4_N: XP2.B3 XP5.8 | length 81
  Bottom Layer w0.49: XP5.8 61.126,84.481 64.015,84.481 65.159,85.625 70.383,85.625 72.2,83.808 72.2,77.7 79.901,69.999 79.901,38.977 75.939,35.015 69.809,35.015 67.321,37.503 67.321,37.909 68.246,38.834 68.246,40.63 XP2.B3
eth4_P: XP2.B4 XP5.7 | length 81.7
  Bottom Layer w0.49: XP5.7 63.749,85.834 64.393,85.834 64.873,86.315 70.669,86.315 72.89,84.094 72.89,77.986 80.591,70.285 80.591,38.691 76.225,34.325 69.523,34.325 66.631,37.217 66.631,37.909 65.706,38.834 65.706,40.63 XP2.B4
eth5_N: XP2.C15 XP6.2 | length 48.8
  Bottom Layer w0.49: XP6.2 34.243,90.758 33.441,90.758 33.272,90.589 33.272,67.886 34.646,66.512 34.646,46.29 XP2.C15
eth5_P: XP2.C16 XP6.1 | length 51.9
  Bottom Layer w0.49: XP2.C16 33.956,66.227 32.582,67.601 32.582,90.875 33.909,92.202 XP6.1
eth6_N: XP2.C13 XP6.6 | length 56.3
  Bottom Layer w0.49: XP6.6 35.562,86.997 35.562,89.886 36.483,90.807 38.259,90.807 38.792,90.274 38.792,81.543 37.647,80.398 37.647,66.2 41.576,62.271 XP2.C13
eth6_P: XP2.C14 XP6.3 | length 49.4
  Bottom Layer w0.49: XP6.3 37.131,89.488 37.798,89.488 38.102,89.184 38.102,81.829 36.957,80.684 36.957,65.915 40.886,61.986 40.886,45.546 40.002,44.662 39.258,44.662 XP2.C14
GA_N: XP2.B10 XP10.3 | length 42.4
  Top Layer w0.49: XP10.3@31.878,54.253 31.243,54.253 30.853,53.863 30.853,53.576 30.853,39.632 33.269,37.216 51.104,37.216 51.391,37.503 51.391,37.909 50.466,38.834 50.466,40.63 XP2.B10
GA_P: XP2.B9 XP10.4 | length 48.3
  Top Layer w0.49: XP10.4@32.075,57.253 31.878,57.253 31.243,57.253 30.853,56.863 30.985,56.863 30.985,55.894 30.163,55.072 30.163,39.346 32.983,36.526 51.39,36.526 52.081,37.217 52.081,37.909 53.006,38.834 53.006,40.63 XP2.B9
GND: C1.1 C2.1 C3.1 C4.1 C5.1 C6.1 C7.1 C8.1 C9.1 C10.2 C11.2 XP1.N XP2.C1 XP2.C2 XP2.C3 XP2.C4 XP2.C5 XP2.C6 XP2.C7 XP2.C8 XP2.C9 XP3.0 XP3.4 XP4.0 XP4.4 XP7.0 XP7.4 XP8.0 XP8.2 XP9.0 XP9.2 XP10.0 XP10.1 XP11.0 XP11.4 XP12.0 XP12.2 XP13.12 XP13.14 XP13.16 XP13.18 XP13.20 XP13.22 XP13.24 XP13.26 XP13.28 XP13.31 XP13.34
  other v1: 39.65,2.975 42.65,2.975 45.65,2.975 48.65,2.975 51.65,2.975 54.65,2.975 57.65,2.975 60.65,2.975 63.65,2.975 66.65,2.975 32.15,5.975 35.15,5.975 38.15,5.975 44.15,5.975 62.15,5.975 68.15,5.975 71.15,5.975 74.15,5.975 33.65,8.975 36.65,8.975 39.65,8.975 66.65,8.975 69.65,8.975 72.65,8.975 75.65,8.975 78.65,8.975 23.15,11.975 32.15,11.975 35.15,11.975 38.15,11.975 68.15,11.975 71.15,11.975 74.15,11.975 77.15,11.975 80.15,11.975 83.15,11.975 18.65,14.975 21.65,14.975 24.65,14.975 27.65,14.975 30.65,14.975 33.65,14.975 36.65,14.975 69.65,14.975 72.65,14.975 75.65,14.975 78.65,14.975 81.65,14.975 84.65,14.975 87.65,14.975 17.15,17.975 20.15,17.975 23.15,17.975 26.15,17.975 29.15,17.975 32.15,17.975 35.15,17.975 38.15,17.975 68.15,17.975 71.15,17.975 74.15,17.975 77.15,17.975 80.15,17.975 83.15,17.975 86.15,17.975 89.15,17.975 18.65,20.975 21.65,20.975 24.65,20.975 27.65,20.975 33.65,20.975 36.65,20.975 69.65,20.975 72.65,20.975 75.65,20.975 78.65,20.975 81.65,20.975 84.65,20.975 87.65,20.975 20.15,23.975 23.15,23.975 26.15,23.975 29.15,23.975 32.15,23.975 35.15,23.975 38.15,23.975 68.15,23.975 71.15,23.975 74.15,23.975 77.15,23.975 80.15,23.975 83.15,23.975 18.65,26.975 21.65,26.975 24.65,26.975 27.65,26.975 30.65,26.975 33.65,26.975 36.65,26.975 39.65,26.975 66.65,26.975 69.65,26.975 72.65,26.975 75.65,26.975 78.65,26.975 81.65,26.975 84.65,26.975 87.65,26.975 17.15,29.975 20.15,29.975 23.15,29.975 44.15,29.975 62.15,29.975 83.15,29.975 86.15,29.975 89.15,29.975 6.65,32.975 15.65,32.975 18.65,32.975 21.65,32.975 24.65,32.975 42.65,32.975 45.65,32.975 48.65,32.975 51.65,32.975 54.65,32.975 57.65,32.975 84.65,32.975 87.65,32.975 90.65,32.975 99.65,32.975 11.15,35.975 14.15,35.975 17.15,35.975 20.15,35.975 23.15,35.975 32.15,35.975 53.15,35.975 56.15,35.975 62.15,35.975 71.15,35.975 74.15,35.975 83.15,35.975 92.15,35.975 95.15,35.975 12.65,38.975 15.65,38.975 18.65,38.975 21.65,38.975 27.65,38.975 78.65,38.975 81.65,38.975 5.15,41.975 8.15,41.975 11.15,41.975 14.15,41.975 17.15,41.975 20.15,41.975 98.15,41.975 101.15,41.975 104.15,41.975 81.55,44.675 84.2,44.775 3.65,44.975 6.65,44.975 9.65,44.975 12.65,44.975 15.65,44.975 18.65,44.975 21.65,44.975 27.65,44.975 78.65,44.975 87.65,44.975 99.65,44.975 102.65,44.975 5.15,47.975 8.15,47.975 11.15,47.975 14.15,47.975 17.15,47.975 20.15,47.975 26.15,47.975 38.15,47.975 98.15,47.975 101.15,47.975 104.15,47.975 3.65,50.975 6.65,50.975 9.65,50.975 12.65,50.975 15.65,50.975 18.65,50.975 21.65,50.975 36.65,50.975 39.65,50.975 93.65,50.975 99.65,50.975 5.15,53.975 8.15,53.975 11.15,53.975 14.15,53.975 17.15,53.975 20.15,53.975 38.15,53.975 71.15,53.975 77.15,53.975 89.15,53.975 92.15,53.975 95.15,53.975 98.15,53.975 3.65,56.975 6.65,56.975 9.65,56.975 12.65,56.975 15.65,56.975 18.65,56.975 63.65,56.975 66.65,56.975 78.65,56.975 81.65,56.975 87.65,56.975 93.65,56.975 96.65,56.975 99.65,56.975 102.65,56.975 81.55,59.55 5.15,59.975 8.15,59.975 11.15,59.975 14.15,59.975 17.15,59.975 20.15,59.975 32.15,59.975 38.15,59.975 47.15,59.975 71.15,59.975 77.15,59.975 92.15,59.975 95.15,59.975 98.15,59.975 101.15,59.975 104.15,59.975 84.225,61.025 3.65,62.975 6.65,62.975 9.65,62.975 12.65,62.975 15.65,62.975 42.65,62.975 78.65,62.975 81.65,62.975 90.65,62.975 93.65,62.975 96.65,62.975 99.65,62.975 102.65,62.975 81.575,65.325 11.15,65.975 14.15,65.975 17.15,65.975 20.15,65.975 29.15,65.975 71.15,65.975 77.15,65.975 89.15,65.975 92.15,65.975 95.15,65.975 98.15,65.975 101.15,65.975 12.65,68.975 15.65,68.975 18.65,68.975 27.65,68.975 42.65,68.975 57.65,68.975 78.65,68.975 81.65,68.975 90.65,68.975 93.65,68.975 96.65,68.975 99.65,68.975 102.65,68.975 84.25,69.15 5.15,71.975 8.15,71.975 14.15,71.975 17.15,71.975 20.15,71.975 80.15,71.975 89.15,71.975 92.15,71.975 98.15,71.975 101.15,71.975 15.65,74.975 18.65,74.975 21.65,74.975 24.65,74.975 39.65,74.975 48.65,74.975 72.65,74.975 78.65,74.975 81.65,74.975 20.15,77.975 23.15,77.975 35.15,77.975 53.15,77.975 56.15,77.975 68.15,77.975 71.15,77.975 74.15,77.975 77.15,77.975 21.65,80.975 24.65,80.975 27.65,80.975 51.65,80.975 69.65,80.975 75.65,80.975 78.65,80.975 82.775,81.55 20.15,83.975 23.15,83.975 26.15,83.975 41.15,83.975 53.15,83.975 65.15,83.975 80.15,83.975 86.15,83.975 18.65,86.975 21.65,86.975 24.65,86.975 27.65,86.975 39.65,86.975 42.65,86.975 45.65,86.975 63.65,86.975 72.65,86.975 77.3,86.975 84.65,86.975 87.65,86.975 17.15,89.975 20.15,89.975 23.15,89.975 26.15,89.975 29.15,89.975 41.15,89.975 44.15,89.975 47.15,89.975 56.15,89.975 65.15,89.975 83.15,89.975 86.15,89.975 89.15,89.975 21.65,92.975 24.65,92.975 30.65,92.975 39.65,92.975 45.65,92.975 72.65,92.975 75.65,92.975 78.65,92.975 81.65,92.975 84.65,92.975 23.15,95.975 32.15,95.975 41.15,95.975 44.15,95.975 47.15,95.975 59.15,95.975 68.15,95.975 77.15,95.975 80.15,95.975 30.65,98.975 33.65,98.975 63.65,98.975 66.65,98.975 69.65,98.975 72.65,98.975 75.65,98.975 35.15,101.975 38.15,101.975 41.15,101.975 44.15,101.975 47.15,101.975 59.15,101.975 65.15,101.975 68.15,101.975 71.15,101.975
NetR1_2: R1.2 R2.2 XP9.1 | length 6.5
  Top Layer w0.2: XP9.1@84.71,59.182 XP9.1@84.837,59.055 ; R2.2 XP9.1@84.837,59.055 ; R1.2 86.741,62.372 86.741,61.468 85.273,60 85.273,59.491 XP9.1@84.837,59.055
PWM1: XP2.A11 XP13.30 | length 51.8
  Top Layer w0.2: v1(46.101,46.355) 46.829,45.627 47.228,45.627 47.8,45.055 47.8,41.07 46.933,40.203 46.933,39.637 XP2.A11
  Bottom Layer w0.2: v1(46.101,46.355) 46.101,48.514 48.66,51.073 48.66,61.36 50.292,62.992 50.292,85.552 XP13.30
PWM2: XP2.A12 XP13.32 | length 53.8
  Bottom Layer w0.2: XP2.A12 45.531,40.775 45.531,46.079 45.501,46.109 45.501,74.838 48.895,78.232 48.895,86.695 XP13.32
PWM3: XP2.A13 XP4.3 | length 73.6
  Top Layer w0.2: XP2.A13 42.898,40.682 42.898,45.766 43.942,46.81 43.942,54.676 44.644,55.378 47.885,55.378 49.075,56.568 49.075,60.886 51.181,62.992 55.372,62.992 56.769,61.595 63.748,61.595 66.7,64.547 66.7,72.3 67.35,72.95 77.2,72.95 78.879,71.271 XP4.3@84.71,71.271
PWM4: XP2.A14 XP4.2 | length 68.1
  Top Layer w0.2: XP2.A14 40.451,40.775 40.451,44.906 42.591,47.046 42.591,57.141 47.975,62.525 47.975,63.087 50.915,65.875 55.375,65.875 56.861,64.389 65.139,64.389 65.8,65.05 65.8,74.525 67.425,76.15 74.091,76.15 75.152,75.089 75.152,74.419 XP4.2
RS485_N: XP2.B16 XP3.2 XP7.2 | length 50.9
  Top Layer w0.2: XP2.B16 32.831,43.025 32.831,51.861 34.398,53.428 34.398,54.659 34.8,55.061 35.54,55.061 35.658,55.178 35.658,55.4 36.565,56.308 36.565,56.591 36.616,56.642 37.44,56.642 37.491,56.591 39.769,56.591 44.7,61.522 44.7,64.512 48.768,68.58 48.768,70.993 51.285,73.51 51.427,73.51 51.437,73.52 55.006,73.52 55.757,74.271 XP7.2@59.816,74.271
RS485_P: XP2.B15 XP3.1 XP7.1 | length 52.2
  Top Layer w0.2: XP2.B15 35.32,43.076 35.32,44.667 34.422,45.565 33.348,45.565 33.231,45.682 33.231,51.671 34.632,53.072 34.798,53.238 34.798,54.493 34.915,54.61 36.058,54.61 36.058,55.235 37.014,56.191 39.935,56.191 45.1,61.356 45.1,64.346 49.168,68.414 49.168,70.827 51.451,73.11 55.006,73.11 56.845,71.271 XP7.1@59.816,71.271
UART2_RX: XP2.B14 XP12.3 | length 41.9
  Top Layer w0.2: v1(31.725,55.65) 32.198,56.123 33.373,56.123 34.125,56.875 34.125,58.675 39.25,63.8 39.25,66.928 40.14,67.818 42.418,67.818 44.22,69.62 XP12.3
  Bottom Layer w0.2: v1(31.725,55.65) 31.725,45.08 33.729,43.076 37.86,43.076 XP2.B14
UART2_TX: XP2.B13 XP12.4 | length 50.9
  Top Layer w0.2: v1(31.369,58.674) 32.399,58.674 38.081,64.356 38.081,66.91 43.791,72.62 XP12.4
  Bottom Layer w0.2: v1(31.369,58.674) 29.025,56.33 29.025,45.24 33.49,40.775 40.451,40.775 XP2.B13
UART5_RX: XP2.B12 XP11.3 | length 64.6
  Top Layer w0.2: v1(29.718,69.596) 31.727,69.596 XP11.3@31.878,69.747
  Bottom Layer w0.2: v1(29.718,69.596) 25.018,64.896 25.018,35.466 25.018,35.383 27.476,32.925 37.55,32.925 40.426,35.801 40.426,39.801 41.349,40.724 42.94,40.724 XP2.B12
UART5_TX: XP2.B11 XP11.2 | length 73
  Top Layer w0.2: XP11.2@22.478,72.747 22.823,72.402 v1(22.823,71.445)
  Bottom Layer w0.2: v1(22.823,71.445) 20.975,69.597 20.975,34.905 25.908,29.972 37.465,29.972 45.48,37.987 45.48,39.775 46.597,40.892 46.597,41.841 XP2.B11
pads on no net: M1.0 XP2. XP2.A16 XP5.9 XP5.10 XP5.11 XP5.12 XP5.MH1 XP5.MH2 XP5.MH3 XP5.MH4 XP6.4 XP6.5 XP6.7 XP6.8 XP6.9 XP6.10 XP6.11 XP6.12 XP6.MH1 XP6.MH2 XP6.MH3 XP6.MH4

## Polygon pours and split planes (outlines as drawn)
GND on Top Layer "GND_L01_P016" (solid, pour order 16): 6.451,32.279 cw(c5.638,34.106) 3.78,33.365 cw(c53.006,53.006) 3.78,72.648 cw(c5.638,71.907) 6.451,73.734 11.023,71.699 ccw(c11.836,73.526) 13.626,72.634 cw(c53.006,53.006) 19.058,80.999 ccw(c17.515,82.271) 18.854,83.757 15.135,87.106 cw(c16.473,88.592) 15.04,89.988 cw(c53.006,53.006) 90.972,89.988 cw(c89.539,88.592) 90.877,87.106 87.158,83.757 ccw(c88.497,82.271) 86.954,80.999 cw(c53.006,53.007) 92.386,72.634 ccw(c94.176,73.526) 94.989,71.699 99.561,73.734 cw(c100.374,71.907) 102.232,72.648 cw(c53.006,53.006) 102.232,33.365 cw(c100.374,34.106) 99.561,32.279 94.989,34.314 ccw(c94.176,32.487) 92.386,33.379 cw(c53.006,53.006) 86.954,25.014 ccw(c88.497,23.742) 87.158,22.255 90.877,18.907 cw(c89.539,17.421) 90.972,16.025 cw(c53.006,53.006) 15.04,16.025 cw(c16.473,17.421) 15.135,18.907 18.854,22.255 ccw(c17.515,23.742) 19.058,25.014 cw(c53.006,53.006) 13.626,33.379 ccw(c11.836,32.487) 11.023,34.314
+24 on Top Layer "+24_L01_P009" (solid, remove dead copper, pour order 9): 87.831,53.213 89.124,53.213 96.012,47.21 96.012,37.87 90.424,37.87 90.424,44.632 87.831,47.15
+24 on Top Layer "+24_L01_P000" (solid, remove dead copper, pour order 0): 57.35,60.475 49.375,60.475 49.375,50.675 57.35,50.675
+12 on Top Layer "+12_L01_P005" (solid, pour order 5): 56.642,103.124 53.04,103.124 53.04,93.775 56.642,93.775
+24 on Top Layer "+24_L01_P001" (solid, remove dead copper, pour order 1): 54.993,47.15 87.927,47.15 87.927,53.213 54.993,53.213
+24 on Top Layer "+24_L01_P002" (solid, remove dead copper, pour order 2): 49.376,52.07 49.375,50.675 52.905,47.145 56.852,47.145 56.78,52.07
GND on Bottom Layer "GND_L02_P017" (solid, pour order 17): 6.445,32.3 cw(c5.632,34.127) 3.774,33.386 cw(c53,53.027) 3.774,72.669 cw(c5.632,71.928) 6.445,73.755 11.017,71.719 ccw(c11.83,73.547) 13.62,72.654 cw(c53,53.027) 19.052,81.02 ccw(c17.509,82.292) 18.848,83.778 15.129,87.127 cw(c16.467,88.613) 15.034,90.008 cw(c53,53.027) 90.966,90.008 cw(c89.533,88.613) 90.871,87.127 87.152,83.778 ccw(c88.491,82.292) 86.948,81.02 cw(c53,53.027) 92.38,72.654 ccw(c94.17,73.547) 94.983,71.719 99.555,73.755 cw(c100.368,71.928) 102.226,72.669 cw(c53,53.027) 102.226,33.386 cw(c100.368,34.127) 99.555,32.3 94.983,34.335 ccw(c94.17,32.508) 92.38,33.4 cw(c53,53.027) 86.948,25.035 ccw(c88.491,23.763) 87.152,22.276 90.871,18.928 cw(c89.533,17.442) 90.966,16.046 cw(c53,53.027) 15.034,16.046 cw(c16.467,17.442) 15.129,18.928 18.848,22.276 ccw(c17.509,23.763) 19.052,25.035 cw(c53,53.027) 13.62,33.4 ccw(c11.83,32.508) 11.017,34.335
+5 on Bottom Layer "+5_L02_P006" (solid, remove dead copper, pour order 6): 53.25,101.981 49.975,101.981 49.975,93.726 53.25,93.726

## Keep-outs
Keep-Out Layer:
  circle w1.2: c28.007,9.705 r2.6
  circle w1.2: c6.885,38.006 r2.6
  circle w1.2: c6.884,67.806 r2.6
  circle w1.2: c28.007,96.308 r2.6
  circle w1.2: c103.007,53.006 r2.6
  circle w1.2: c99.129,38.006 r2.6

## Silkscreen, mask and mechanical layers (free items; w line width, h text height)
Top Overlay:
  text "свет" at 82.55,78.968 h2
  text "экранчик" at 67.25,78.429 h2
  text "DVL" at 35.025,77.425 h2
  text "модем" at 18.55,76.609 h2
  text "rs_n" at 59.117,75.475 h1.5 r90
  text "G" at 68.375,75.438 h1.5
  text "pwm" at 72.875,75.434 h1.5
  text "G" at 84.325,75.363 h1.5
  text "tx" at 20.575,73.813 h1.5
  text "tx" at 46.325,73.688 h1.5
  text "G" at 33.175,73.663 h1.5
  text "G" at 35.7,73.663 h1.5
  text "pwm" at 85.65,72.559 h1.5
  text "+24" at 73.55,72.4 h1.5
  text "+24" at 68.836,72.346 h1.5
  text "rx" at 46.375,70.725 h1.5
  text "+5" at 20.425,70.663 h1.5
  text "rx" at 32.775,70.625 h1.5
  text "+12" at 34.851,70.455 h1.5
  text "rs_p" at 59.091,67.75 h1.5 r90
  text "dc_dc enable" at 65.925,62.103 h2
  text "давление" at 31.6,61.534 h2
  text "G" at 74.775,60.363 h1.5
  text "га_p" at 31.775,58.234 h1.5
  text "rs_n" at 34.575,58.233 h1.5
  text "G" at 46.3,58.188 h1.5
  text "+5" at 21.375,58.063 h1.5
  text "pull_up" at 84.175,57.434 h1.5
  text "пеленгатор" at 12.25,55.429 h2
  text "rs_p" at 34.8,55.27 h1.5
  text "га_n" at 32.066,55.221 h1.5
  text "G" at 22,55.188 h1.5
  text "+24" at 45.65,55.125 h1.5
  text "+12" at 31.175,30.525 h1.5
  text "Вентилятор" at 18.447,29.929 h2
  text "G" at 31.447,19.988 h1.5
Bottom Overlay:
  text "DVL" at 46.525,96.9 h2
Mechanical 1:
  circle w0.013: c6.884,38.006 r1.6
  circle w0.013: c99.128,38.006 r1.6
  circle w0.013: c103.006,53.006 r1.6
  circle w0.013: c28.006,96.308 r1.6
  circle w0.013: c28.006,9.705 r1.6
  circle w0.013: c53.006,53.006 r4.596
  lines w0.013: 3.78,33.365 cw(c53.006,53.006) 3.78,72.648 cw(c5.638,71.907) 6.451,73.734 11.023,71.699 ccw(c11.836,73.526) 13.626,72.634 cw(c53.006,53.006) 19.058,80.999 ccw(c17.515,82.271) 18.854,83.757 15.135,87.106 cw(c16.473,88.592) 15.04,89.988 cw(c53.006,53.006) 90.972,89.988 cw(c89.539,88.592) 90.877,87.106 87.158,83.757 ccw(c88.497,82.271) 86.954,80.999 cw(c53.006,53.006) 92.386,72.634 ccw(c94.176,73.526) 94.989,71.699 99.561,73.734 cw(c100.374,71.907) 102.232,72.648 cw(c53.006,53.006) 102.232,33.365 cw(c100.374,34.106) 99.561,32.279 94.989,34.314 ccw(c94.176,32.487) 92.386,33.379 cw(c53.006,53.006) 86.954,25.014 ccw(c88.497,23.742) 87.158,22.255 90.877,18.907 cw(c89.539,17.421) 90.972,16.025 cw(c53.006,53.006) 15.04,16.025 cw(c16.473,17.421) 15.135,18.907 18.854,22.255 ccw(c17.515,23.742) 19.058,25.014 cw(c53.006,53.006) 13.626,33.379 ccw(c11.836,32.487) 11.023,34.314 6.451,32.279 cw(c5.638,34.106) 3.78,33.365